# Altium PCB Relay Module.PcbDoc
Units mm, origin at the board's own origin, x right, y up, seen from the top; angles counter-clockwise.
Board outline 48.75 x 20 mm, 2 copper layers (Top Layer, Bottom Layer); 10 components, 10 nets, 26 pads, 2 vias.
Unrouted connection lines stored in the file: 2.
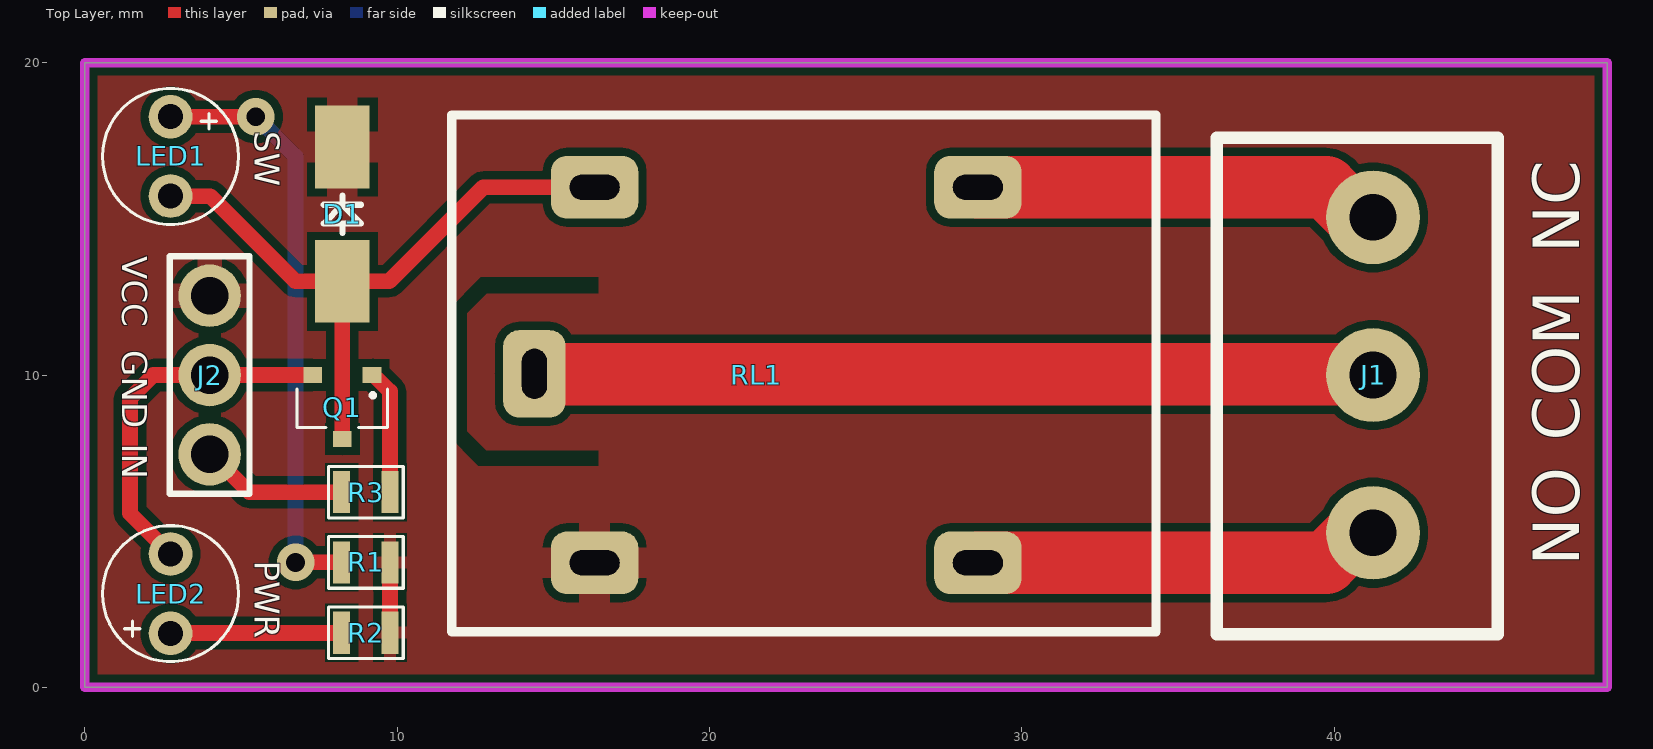
[diagram p0: Top Layer view]
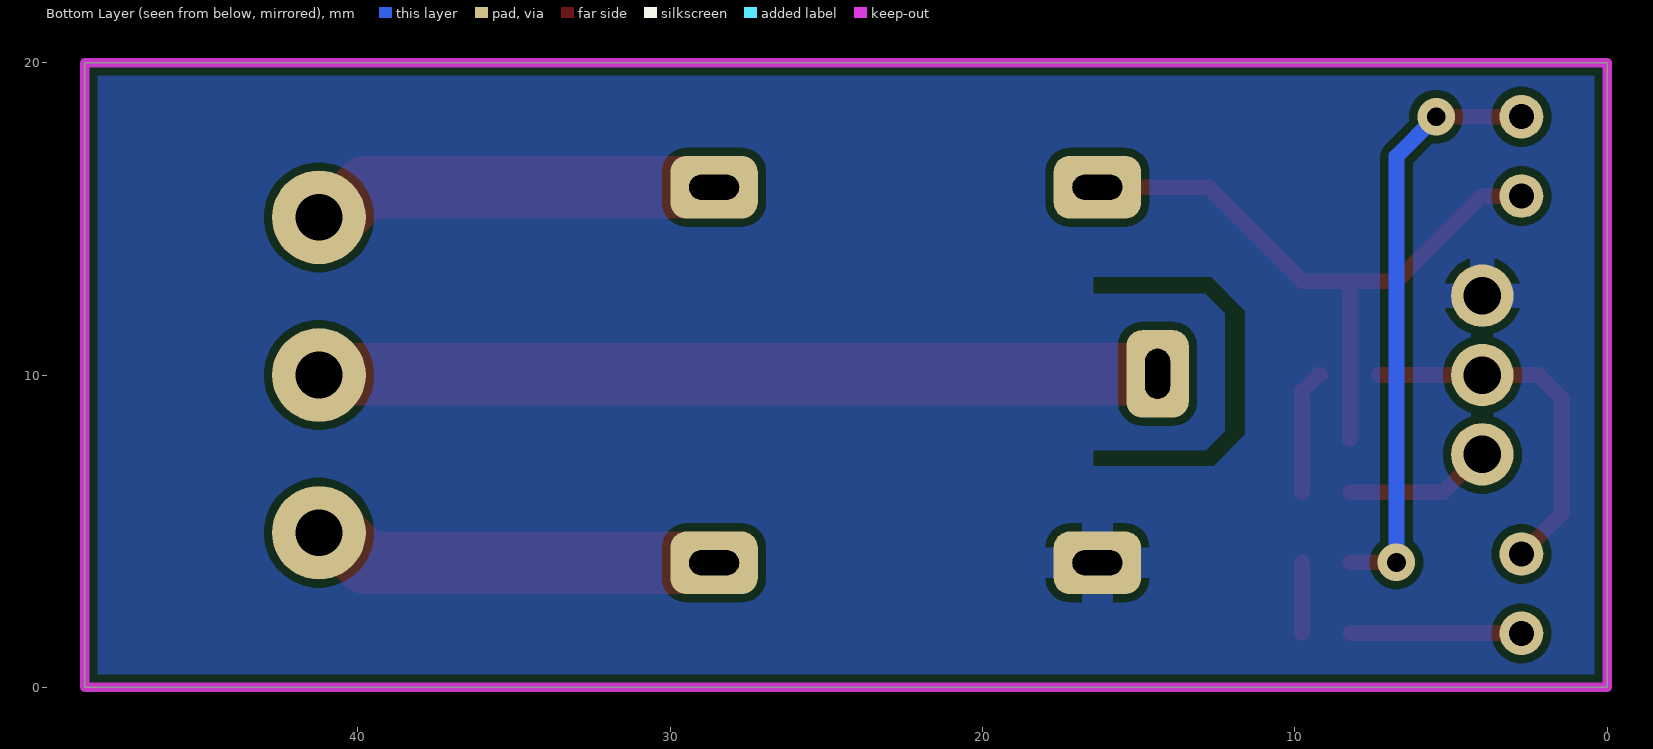
[diagram p1: Bottom Layer view, seen from below]
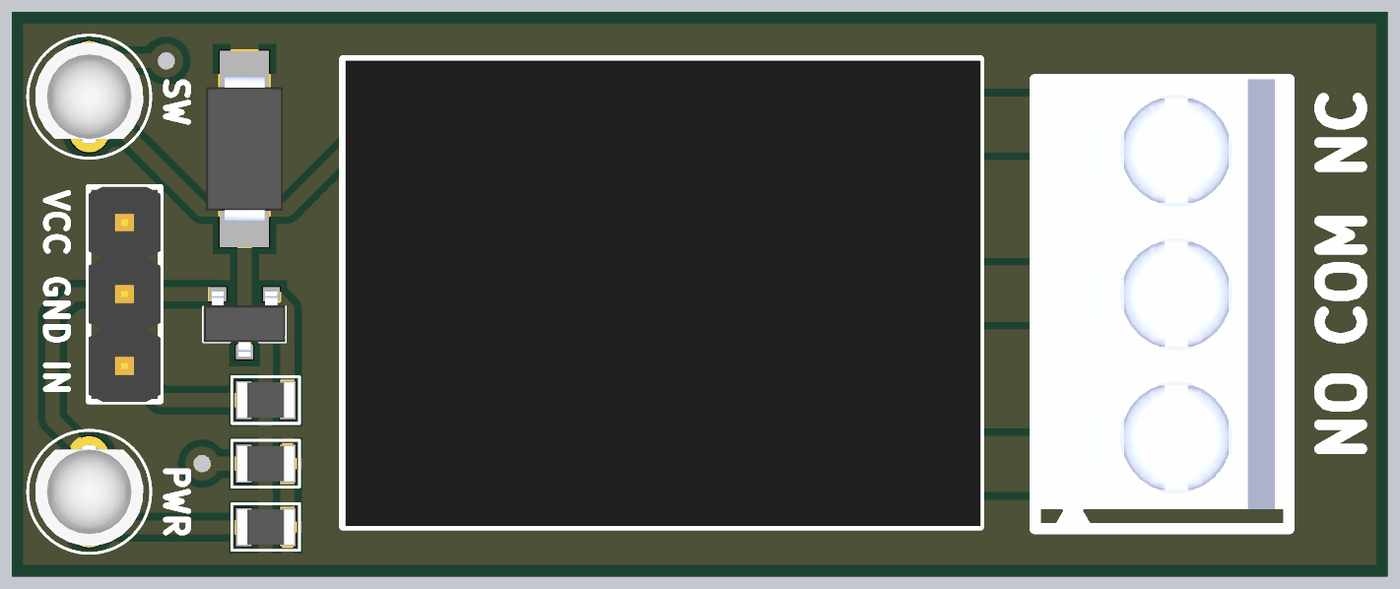
[diagram p2: 3D render of the assembled board from above, using the file's embedded part models]

## Layer stack, top to bottom
Top Solder: solder mask 0.0102, Solder Resist, Dk 3.5
Top Layer: signal copper 0.0356
Dielectric 1: dielectric 0.32, FR-4, Dk 4.8
Bottom Layer: signal copper 0.0356
Bottom Solder: solder mask 0.0102, Solder Resist, Dk 3.5

## Board outline
0,0 0,20 48.75,20 48.75,0

## Design rules (kind name [scope] priority, off if disabled: settings)
Clearance [All] p1: gap=0.254 ignorepadtopadclearanceinfootprint=FALSE except(0: Arc-Hole Track-Hole SMDPad-Hole THPad-Hole Via-Hole Fill-Hole Poly-Hole Region-Hole Text-Hole)
PolygonConnect [All] p1: connectstyle=Relief reliefconductorwidth=0.254 reliefentries=4 polygonreliefangle="90 Angle" airgapwidth=0.254
RoutingVias [All] p1: holewidth=0.711 width=1.27 viastyle="Through Hole" minholewidth=0.711 minwidth=1.27 maxholewidth=0.711 maxwidth=1.27
SolderMaskExpansion [All] p1: expansion=0.102 istentingtop=FALSE
Width [All] p1: maxlimit=10 minlimit=0.254 preferedwidth=1 minimp=50.000000 maximp=50.000000 favimp=50.000000
30 further rules are at their usual default settings.

## Components (designator, comment, footprint, x,y, rotation, side; value= is the part's Value field where it differs from the comment)
D1 "S1A" DIODE 8.25,15.15 r90 top
J1 "OSTTA034163" connector 41.25,10 r90 top
J2 "61300311121" HEADER 4,10 r270 top
LED1 "151031VS06000" "GREEN LED" 2.75,17 r270 top
LED2 "151031SS06000" "RED LED" 2.75,3 r90 top
Q1 "PMBT2222A,215" TRANSISTOR 8.25,9.15 r180 top
R1 "RNCP0805FTD1K00" "RES 0805" 9,4 r0 top value=1K
R2 "RNCP0805FTD1K00" "RES 0805" 9,1.75 r0 top value=1K
R3 "RNCP0805FTD1K00" "RES 0805" 9,6.25 r0 top value=1K
RL1 "G5LE-1 DC5" RELAY 21.5,10 r0 top

## Footprints (in the part's own frame and the unit in brackets; to place one, negate y for a bottom-side part, rotate by r counter-clockwise, add the part's x,y. Pads: shape width x height; smd on the part's side, far side on the other; paste and mask are expansions set on the pad)
connector [mm]
  round 3 hole 1.5 mask+0.05: 1(-5.05,0) 2(0,0) 3(5.05,0)
  silkscreen extent -8.3,-4 7.6,5, body extent -8.32,-4 7.62,5, height 13
DIODE [mm]
  rect 2.65x1.75 smd mask+0.05: 1(-2.15,0) 2(2.15,0)
  silkscreen extent -0.6,-0.6 0.6,0.6, body extent -2.6,-1.36 2.6,1.36, height 2.5
"GREEN LED" [mm]
  round 1.4 hole 0.8 mask+0.05: 1(-1.27,0) 2(1.27,0)
  silkscreen extent -2.17,-2.18 2.17,2.18, body extent -1.92,-1.92 1.65,1.92, height 5.3
HEADER [mm]
  round 2 hole 1.2 mask+0.05: 1(-2.54,0) 2(0,0) 3(2.54,0)
  silkscreen extent -3.8,-1.28 3.8,1.28, body extent -3.81,-1.27 3.81,1.27, height 8.57
"RED LED" [mm]
  round 1.4 hole 0.8 mask+0.05: 1(-1.27,0) 2(1.27,0)
  silkscreen extent -2.17,-2.18 2.17,2.18, body extent -1.92,-1.92 1.65,1.92, height 5.3
RELAY [mm]
  rrect50% 2x2.8 hole 0.8 slot 1.6 at 90 deg mask+0.05: 1(-7.1,0.038)
  rrect50% 2.8x2 hole 0.8 slot 1.6 at 0 deg mask+0.05: 2(-5.175,-6.013) 3(7.1,-6.013) 4(7.1,6.013) 5(-5.175,6.013)
  silkscreen extent -9.75,-8.23 12.8,8.32, body extent -9.67,-8.21 12.83,8.29, height 19
"RES 0805" [mm]
  rect 0.55x1.35 smd mask+0.05: 1(-0.775,0) 2(0.775,0)
  silkscreen extent -1.2,-0.82 1.2,0.82, body extent -1,-0.63 1,0.63, height 0.6
TRANSISTOR [mm]
  rect 0.6x0.5 smd mask+0.05: 1(-0.95,-0.85) 2(0.95,-0.85) 3(0,1.2)
  silkscreen extent -1.45,-0.4 1.45,0.83, body extent -1.45,-0.95 1.45,1.35, height 1.1

## Part data
D1: library part "DIODE SMD", "DIODE 50V 1A SMD"
J1: library part CONNECTOR, "TERM BLK 3P 5.08MM PCB"
J2: library part HEADER, "CONN HEADER 3POS 2.54MM"
LED1: library part "GREEN LED TH", "LED GREEN 3MM TH"
LED2: library part "RED LED TH", "LED RED 3MM TH"
Q1: library part TRANSISTOR, "TRANS NPN 30V 0.6A TO236AB"
R1 R2 R3: library part "RES 1K OHM 0805 SMD", "RES 1K OHM 1% 1/4W 0805"
RL1: library part RELAY, "RELAY 5VDC COIL 10A"

## Via types
v1: diameter 1.2, hole 0.6, Top Layer to Bottom Layer, tented both sides, 2 vias

## Nets (pads, with @x,y where several pads share a name; then routed paths per layer and width w, separated by ;. In a path a pad name is that pad's centre, name@x,y a point inside that pad or via, vN(x,y) a via of type N, cw(c..) or ccw(c..) an arc to the next point about the centre after c; other vN are vias at no path point)
COM: J1.2 RL1.1 | length 26.9
  Top Layer w2: RL1.1 14.419,10.019 41.231,10.019 J1.2
GND: J2.2 LED2.2 Q1.2 | length 11.7
  Top Layer w0.5: LED2.2 1.45,5.57 1.45,9.25 2.2,10 J2.2 Q1.2
IN: J2.3 R3.1 | length 4.7
  Top Layer w0.5: J2.3 4.055,7.46 5.265,6.25 R3.1
NC: J1.3 RL1.4 | length 13
  Top Layer w2: RL1.4 39.746,16.013 40.709,15.05 J1.3
NetD1_1: D1.1 LED1.2 Q1.3 RL1.5 | length 21
  Top Layer w0.5: LED1.2 4.02,15.73 6.75,13 D1.1 ; Q1.3 D1.1 ; RL1.5 12.763,16.013 9.75,13 D1.1
NetLED1_1: LED1.1 R1.1 | length 19
  Top Layer w0.5: LED1.1 v1(5.48,18.27) ; v1(6.75,4) R1.1
  Bottom Layer w0.5: v1(5.48,18.27) 6.75,17 v1(6.75,4)
NetLED2_1: LED2.1 R2.1 | length 5.5
  Top Layer w0.5: LED2.1 2.76,1.74 8.215,1.74 R2.1
NetQ1_1: Q1.1 R3.2 | length 4
  Top Layer w0.5: Q1.1 9.25,10 9.775,9.475 R3.2
NO: J1.1 RL1.3 | length 13
  Top Layer w2: RL1.3 39.746,3.988 40.709,4.95 J1.1
VCC: D1.2 J2.1 R1.2 R2.2 RL1.2 | length 2.3
  Top Layer w0.5: R2.2 R1.2

## Polygon pours and split planes (outlines as drawn)
VCC on Bottom Layer "VCC_L02_P000" (solid, remove dead copper, pour order 0): 0.15,19.85 48.6,19.85 48.6,0.15 0.15,0.15
VCC on Top Layer "VCC_L01_P001" (solid, remove dead copper, pour order 1): 0.15,19.85 48.6,19.85 48.6,0.15 0.15,0.15

## Keep-outs
Keep-Out Layer:
  the board outline again, w0.3

## Other copper
Top Layer:
  pour cut-out: 16.45,13.125 16.45,12.625 12.875,12.625 12.225,11.975 12.225,8.2 12.85,7.575 16.45,7.575 16.45,7.1 12.6,7.1 11.6,8.1 11.6,12.05 12.675,13.125
Bottom Layer:
  pour cut-out: 16.45,13.125 16.45,12.625 12.875,12.625 12.225,11.975 12.225,8.2 12.85,7.575 16.45,7.575 16.45,7.1 12.6,7.1 11.6,8.1 11.6,12.05 12.675,13.125

## Silkscreen, mask and mechanical layers (free items; w line width, h text height)
Top Overlay:
  text "SW" at 5.45,17.8 h0.8 r270
  text "NC" at 47.85,13.9 h1.5 r90
  text "VCC" at 1.2,13.8 h0.8 r270
  text "GND" at 1.2,10.8 h0.8 r270
  text "COM" at 47.85,7.9 h1.5 r90
  text "IN" at 1.2,7.8 h0.8 r270
  text "PWR" at 5.45,4.05 h0.8 r270
  text "NO" at 47.85,3.9 h1.5 r90
Route Tool Path:
  lines w0.5: 16.2,7.35 12.725,7.35 12.05,8.025 12.05,12.15 12.775,12.875 16.25,12.875